# EAGLE board wiiceiver v1 (EAGLE 6.5.0)
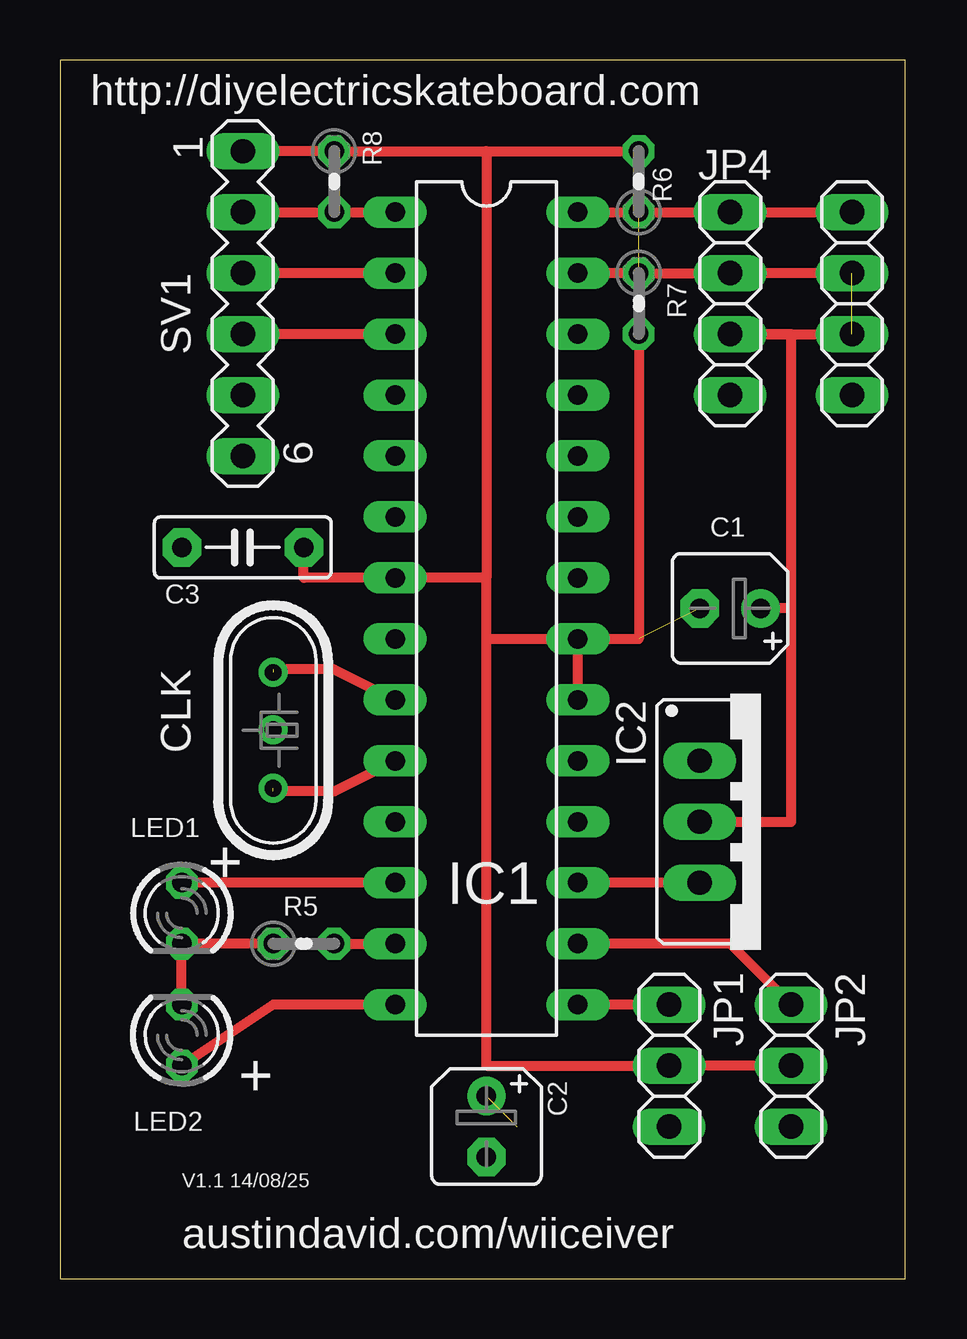
[diagram p0: board, top side]
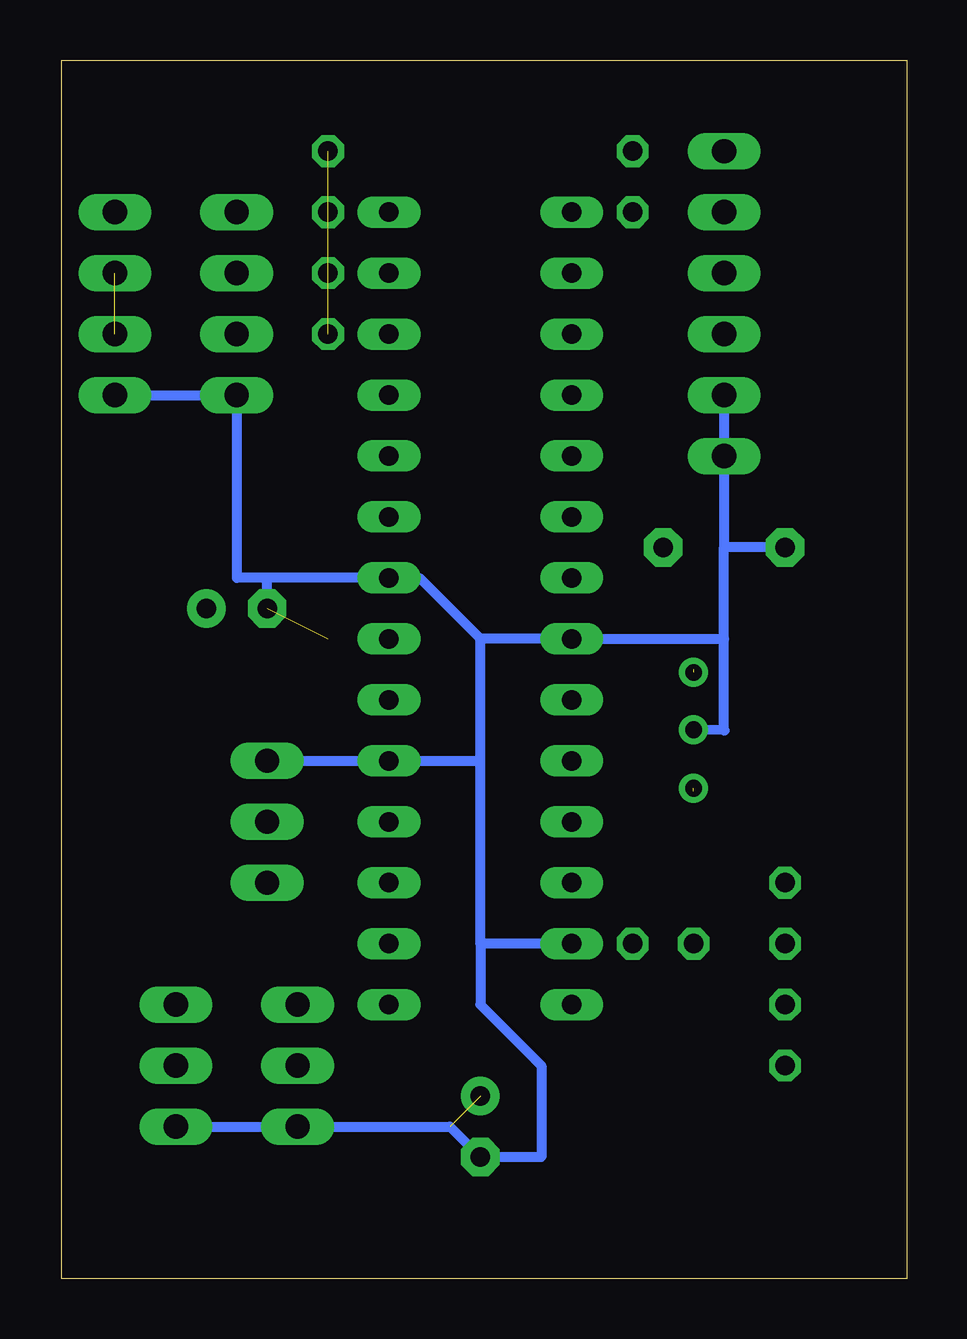
[diagram p1: board, bottom side, seen from below]

Size 35.23 x 50.79 mm. Coordinates in mm from the lower left corner, seen from the top.
Outline: 0,0 35.23,0 35.23,50.79 0,50.79 0,0
Copper layers (1*16): Top 0.035mm / dielectric 1.5mm / Bottom 0.035mm
Design rules "default": minimum track width 10mil, minimum drill 24mil, track to track 8mil, track to pad 8mil, pad to pad 8mil, via to via 8mil, smd to smd 8mil, copper to edge 40mil, drill to drill 8mil, minimum pad ring 10mil, minimum via ring 8mil, stop-mask expansion 4mil, vias tented up to drill 0mil, thermal gap 10mil

## Footprints (pad centres in the part's own frame; a part is rotated, then mirrored left to right if it is on the bottom)
B45181A = drill 0.813 pad 1.6: + -1.27,0 | drill 0.813 pad 1.6 octagon: - 1.27,0
C5B2.5 = drill 0.813 pad 1.6 octagon: 1 -2.54,0; 2 2.54,0
HC49U = drill 0.7 pad 1.2: 1 -2.413,0; 2 -0.027,0; 3 2.413,0
DIL28-3 = drill 0.813 long: 1 -16.51,-3.81; 2 -13.97,-3.81; 3 -11.43,-3.81; 4 -8.89,-3.81; 5 -6.35,-3.81; 6 -3.81,-3.81; 7 -1.27,-3.81; 8 1.27,-3.81; 9 3.81,-3.81; 10 6.35,-3.81; 11 8.89,-3.81; 12 11.43,-3.81; 13 13.97,-3.81; 14 16.51,-3.81; 15 16.51,3.81; 16 13.97,3.81; 17 11.43,3.81; 18 8.89,3.81; 19 6.35,3.81; 20 3.81,3.81; 21 1.27,3.81; 22 -1.27,3.81; 23 -3.81,3.81; 24 -6.35,3.81; 25 -8.89,3.81; 26 -11.43,3.81; 27 -13.97,3.81; 28 -16.51,3.81
317TS = drill 1.016 long: 1 -2.54,-2.54; 2 0,-2.54; 3 2.54,-2.54
1X03 = drill 1.016 long: 1 -2.54,0; 2 0,0; 3 2.54,0
1X04 = drill 1.016 long: 1 -3.81,0; 2 -1.27,0; 3 1.27,0; 4 3.81,0
LED3MM = drill 0.813 octagon: A -1.27,0; K 1.27,0
0204V = drill 0.813 octagon: 1 -1.27,0; 2 1.27,0
MA06-1 = drill 1.016 long: 1 -6.35,0; 2 -3.81,0; 3 -1.27,0; 4 1.27,0; 5 3.81,0; 6 6.35,0

## Placement (x,y rotation side)
C1  22uF  [B45181A]  27.94,27.94 180 top
C2  22uF  [B45181A]  17.78,6.35 270 top
C3  0.1pF  [C5B2.5]  7.62,30.48 180 top
CLK  16MHz  [HC49U]  8.89,22.86 270 top
IC1  ATmega328P  [DIL28-3]  17.78,27.94 270 top
IC2  [317TS]  29.21,19.05 270 top
JP1  Servo  [1X03]  25.4,8.89 270 top
JP2  BEC  [1X03]  30.48,8.89 270 top
JP3  [1X04]  33.02,40.64 270 top
JP4  Nunchuck Hole  [1X04]  27.94,40.64 270 top
LED1  GREEN  [LED3MM]  5.08,15.24 270 top
LED2  RED  [LED3MM]  5.08,10.16 90 top
R5  470  [0204V]  10.16,13.97 0 top
R6  4.7k  [0204V]  24.13,45.72 90 top
R7  4.7k  [0204V]  24.13,40.64 270 top
R8  10k  [0204V]  11.43,45.72 270 top
SV1  [MA06-1]  7.62,40.64 270 top

## Library data of the parts
C1 C2 R5-R8 = resistor
C3 = capacitor-wima
CLK = crystal; OC_FARNELL: unknown; OC_NEWARK: unknown
IC1 = ic-package
IC2 = v-reg
JP1-JP4 = pinhead
LED1 LED2 = led
SV1 = con-lstb; OC_FARNELL: unknown; OC_NEWARK: unknown

## Nets
DIP12: IC1.12 LED1.A
GND: C1.- C2.+ C2.- C3.2 CLK.2 IC1.8 IC1.13 IC1.22 IC2.1 JP1.3 JP2.3 JP3.4 JP4.4 R5.2 R6.2 R7.2 R8.1 SV1.1 SV1.5 SV1.6
N$1: IC1.15 JP1.1
N$2: IC1.1 R8.2 SV1.2
N$3: IC1.26
N$4: IC1.16 JP2.1
N$6: LED1.K LED2.K R5.1
N$7: IC1.14 LED2.A
N$9: CLK.3 IC1.10
N$10: IC1.17 IC2.3
N$11: CLK.1 IC1.9
N$16: C1.+ IC2.2 JP3.2 JP3.3 JP4.3
N$21: IC1.28 JP3.1 JP4.1 R6.1
N$22: IC1.27 JP4.2 R7.1
RX: IC1.2 SV1.3
TX: IC1.3 SV1.4
VIN: C3.1 IC1.7 IC1.20 IC1.21 JP1.2 JP2.2

## Tracks (layer width: path | path; a pad name or v marks a point on that pad's centre or on a via)
DIP12
  Top 0.406: IC1.12 LED1.A
GND  (3 unrouted)
  Top 0.406: R5.2 IC1.13 | SV1.1 R8.1 R6.2 | R7.2 24.13,26.67
  Bottom 0.406: IC1.13 17.78,13.97 | 17.78,13.97 17.78,21.59 | 17.78,21.59 17.78,26.67 | 17.78,26.67 IC1.8 7.62,26.67 | 17.78,26.67 20.32,29.21 IC1.22 26.67,29.21 | 26.67,29.21 27.94,29.21 JP4.4 JP3.4 | C3.2 7.62,30.48 | 7.62,26.67 7.62,22.86 7.59,22.86 CLK.2 | 7.62,26.67 7.62,30.48 | IC2.1 17.78,21.59 | C1.- 26.67,29.21 | 17.78,13.97 17.78,11.43 15.24,8.89 15.24,5.08 C2.- 19.05,6.35 JP1.3 JP2.3 | SV1.5 SV1.6 7.62,30.48
N$1
  Top 0.406: JP1.1 IC1.15
N$2
  Top 0.406: IC1.1 R8.2 SV1.2
N$4
  Top 0.406: JP2.1 27.94,13.97 IC1.16
N$6
  Top 0.406: R5.1 LED1.K LED2.K
N$7
  Top 0.406: IC1.14 8.89,11.43 LED2.A
N$9  (1 unrouted)
  Top 0.406: IC1.10 11.43,20.32 8.89,20.32
N$10
  Top 0.406: IC2.3 IC1.17
N$11  (1 unrouted)
  Top 0.406: IC1.9 11.43,25.4 8.89,25.4
N$16  (1 unrouted)
  Top 0.406: 30.48,27.94 30.48,39.37 JP4.3 JP3.3 | 30.48,27.94 30.48,19.05 IC2.2 | 30.48,27.94 C1.+ | JP3.2 27.94,41.91
N$21
  Top 0.406: JP4.1 R6.1 IC1.28 JP4.1 | JP4.1 JP3.1
N$22
  Top 0.406: IC1.27 R7.1 JP4.2
RX
  Top 0.406: IC1.2 SV1.3
TX
  Top 0.406: IC1.3 SV1.4
VIN
  Top 0.406: 17.78,46.99 17.78,29.21 | 17.78,29.21 IC1.7 10.16,29.21 C3.1 | IC1.20 IC1.21 | IC1.21 24.13,26.67 | 17.78,26.67 IC1.21 | 17.78,26.67 17.78,8.89 JP1.2 JP2.2 | 17.78,26.67 17.78,29.21

## Text on the board
tNames: http://diyelectricskateboard.com | + | + | V1.1 14/08/25 | austindavid.com/wiiceiver